# Altium PCB MiniRobot.PcbDoc
Units mm, origin at the board's own origin, x right, y up, seen from the top; angles counter-clockwise.
Board outline 90 x 85 mm, 2 copper layers (Top Layer, Bottom Layer); 52 components, 47 nets, 193 pads, 15 vias.
Unrouted connection lines stored in the file: 36.
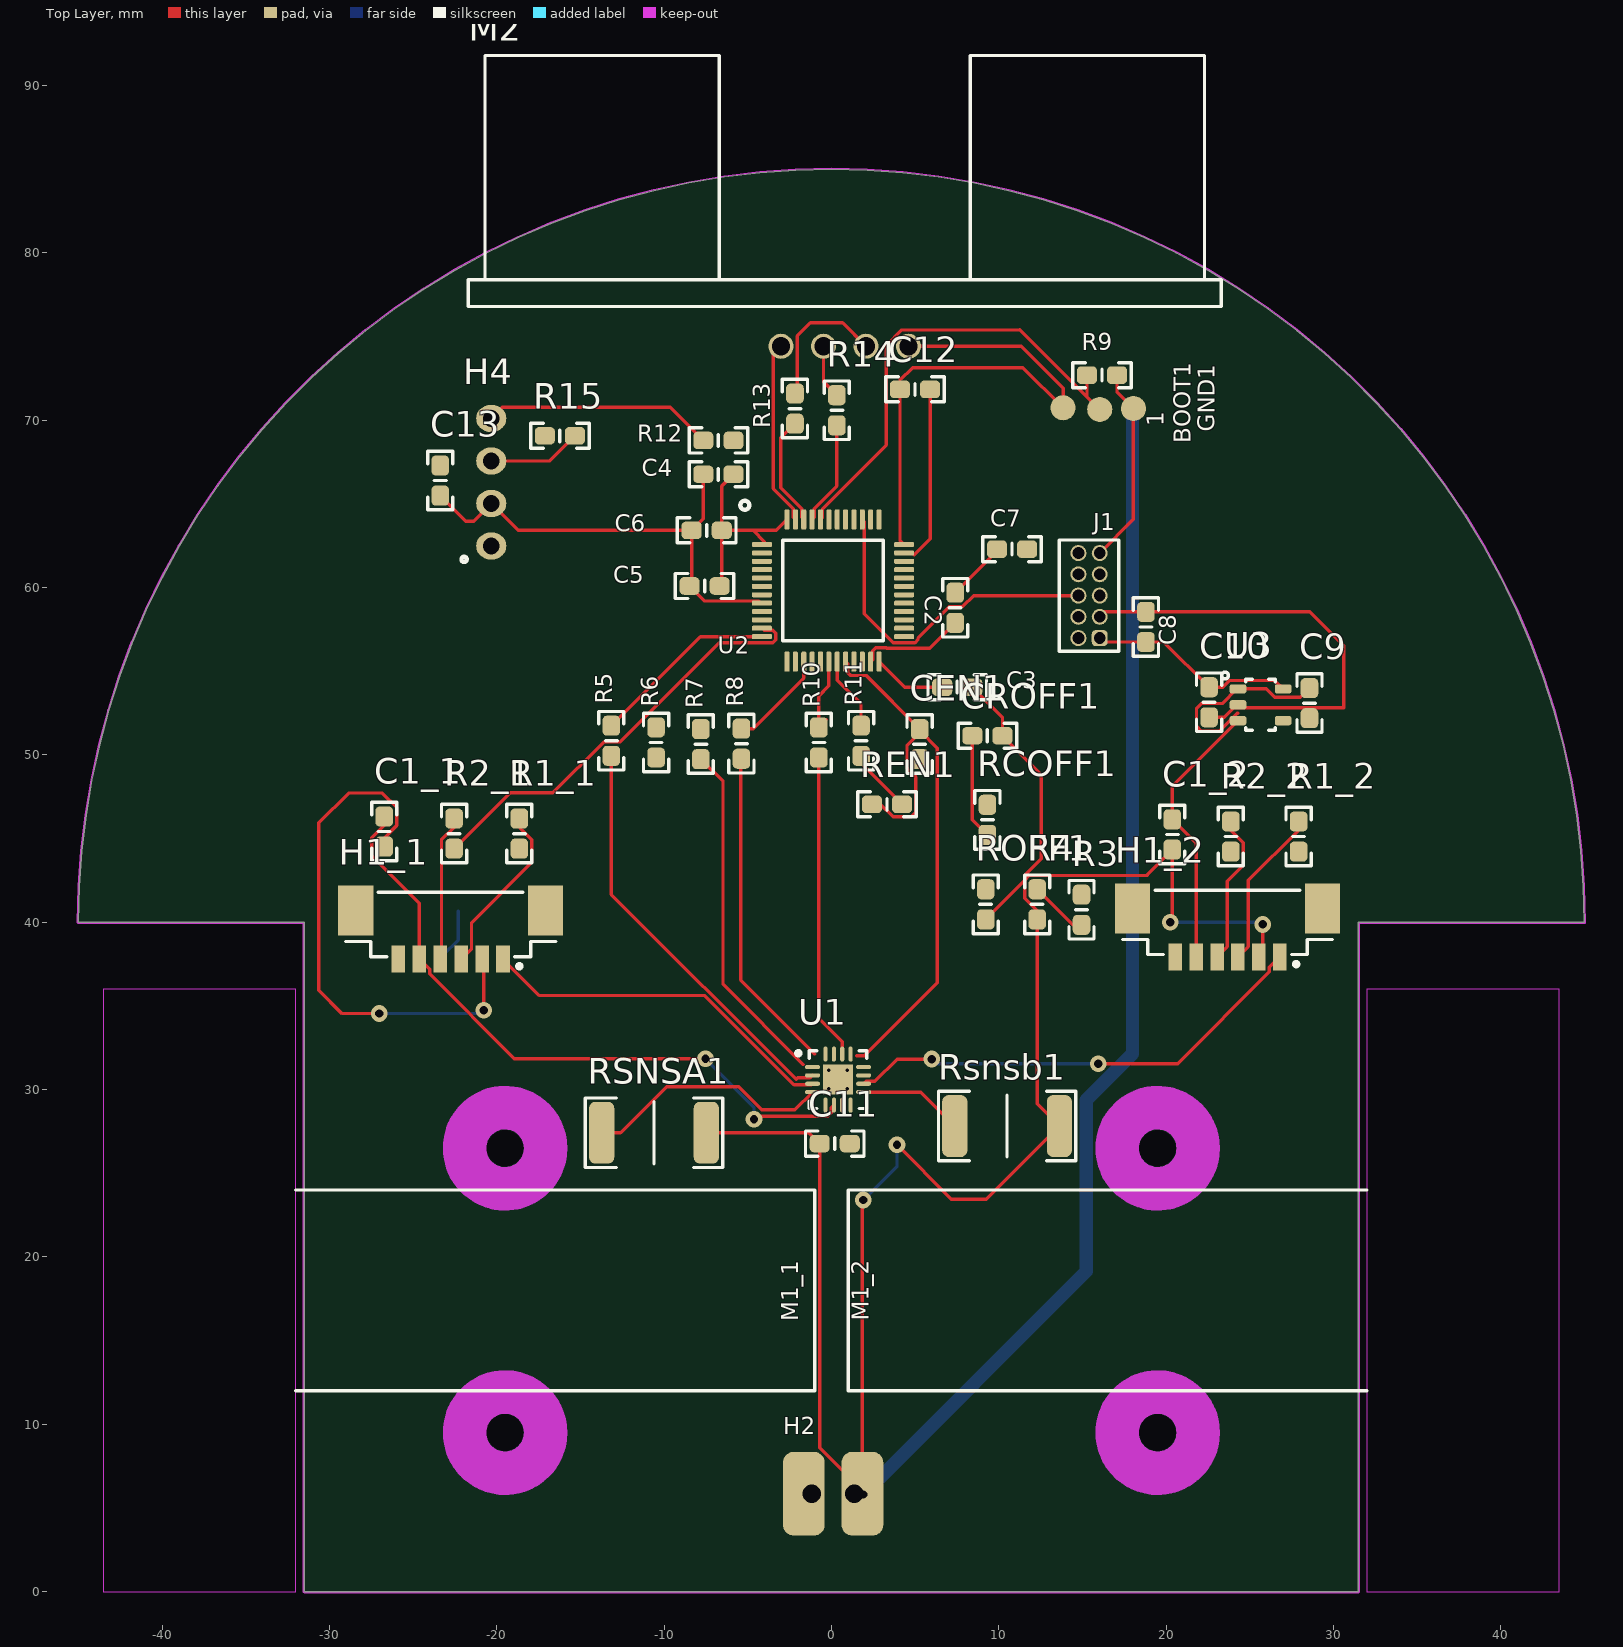
[diagram p0: Top Layer view]
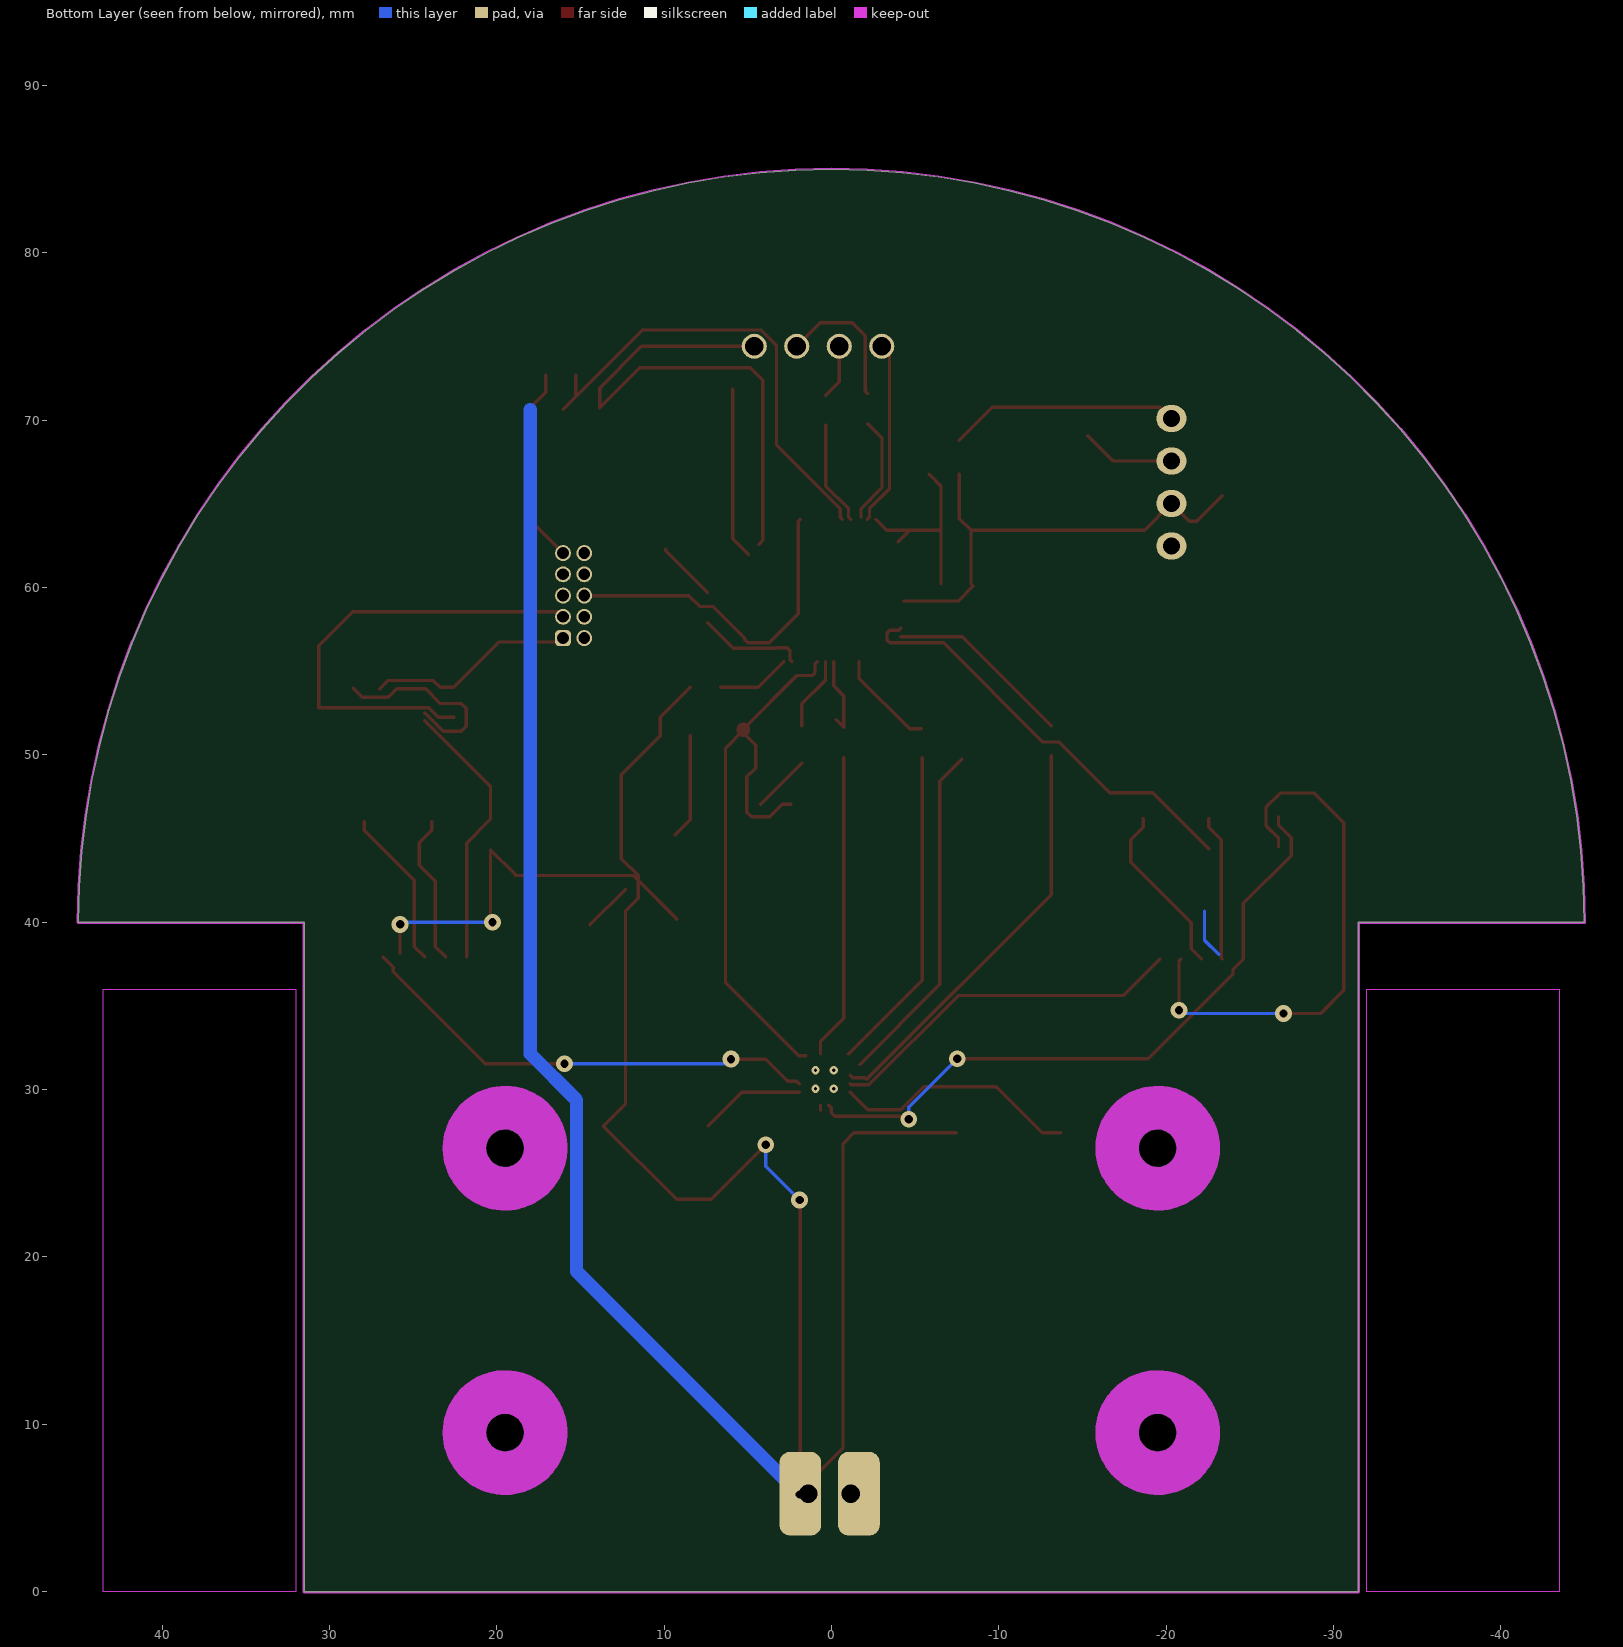
[diagram p1: Bottom Layer view, seen from below]

## Layer stack, top to bottom
Top Solder: solder mask 0.0102, Solder Resist, Dk 3.5
Top Layer: signal copper 0.0356
Dielectric 1: dielectric 0.32, FR-4, Dk 4.8
Bottom Layer: signal copper 0.0356
Bottom Solder: solder mask 0.0102, Solder Resist, Dk 3.5

## Board outline
45,40 44.949,42.141 44.796,44.278 44.542,46.404 44.187,48.516 43.732,50.609 43.177,52.678 42.525,54.718 41.777,56.725 40.933,58.694 39.998,60.62 38.971,62.5 37.856,64.329 36.656,66.103 35.372,67.817 34.009,69.469 32.568,71.054 31.054,72.568 29.469,74.009 27.817,75.372 26.103,76.656 24.329,77.856 22.5,78.971 20.62,79.998 18.694,80.933 16.725,81.777 14.718,82.525 12.678,83.177 10.609,83.732 8.516,84.187 6.404,84.542 4.278,84.796 2.141,84.949 0,85 -2.141,84.949 -4.278,84.796 -6.404,84.542 -8.516,84.187 -10.609,83.732 -12.678,83.177 -14.718,82.525 -16.725,81.777 -18.694,80.933 -20.62,79.998 -22.5,78.971 -24.329,77.856 -26.103,76.656 -27.817,75.372 -29.469,74.009 -31.054,72.568 -32.568,71.054 -34.009,69.469 -35.372,67.817 -36.656,66.103 -37.856,64.329 -38.971,62.5 -39.998,60.62 -40.933,58.694 -41.777,56.725 -42.525,54.718 -43.177,52.678 -43.732,50.609 -44.187,48.516 -44.542,46.404 -44.796,44.278 -44.949,42.141 -45,40 -31.5,40 -31.5,0 31.5,0 31.5,40

## Design rules (kind name [scope] priority, off if disabled: settings)
Clearance [All] p1: gap=0.125
ComponentClearance [All] p1 off: gap=0.254 collisioncheckmode=3 verticalgap=0.254 showdistances=FALSE
HoleSize [All] p1: absolutevalues=TRUE maxlimit=10 minlimit=0.19 maxpercent=80.000 minpercent=20.000
MinimumAnnularRing [All] p1: minimumring=0.076
MinimumSolderMaskSliver [All] p1: minsoldermaskwidth=0.154
PolygonConnect [All] p1: connectstyle=Relief reliefconductorwidth=0.254 reliefentries=4 polygonreliefangle="45 Angle" airgapwidth=0.254
RoomDefinition U_MR_UartConnector [InComponentClass('U_MR_UartConnector')] p1: confinementstyle=ConfineIn formatcopy=TRUE lockcomponents=FALSE outline -299.925,-25.175 -249.125,-25.175 -249.125,0.225 -299.925,0.225
RoomDefinition U_MR_RangeSensor [InComponentClass('U_MR_RangeSensor')] p2: confinementstyle=ConfineIn formatcopy=TRUE lockcomponents=FALSE outline -299.925,-25.175 -249.125,-25.175 -249.125,0.225 -299.925,0.225
RoomDefinition U_MR_Power [InComponentClass('U_MR_Power')] p3: confinementstyle=ConfineIn formatcopy=TRUE lockcomponents=FALSE outline -299.925,-25.175 -249.125,-25.175 -249.125,0.225 -299.925,0.225
RoomDefinition U_MR_Motor_Control [InComponentClass('U_MR_Motor_Control')] p4: confinementstyle=ConfineIn formatcopy=TRUE lockcomponents=FALSE outline -299.925,-25.175 -249.125,-25.175 -249.125,0.225 -299.925,0.225
RoomDefinition U_MR_Mcu [InComponentClass('U_MR_Mcu')] p5: confinementstyle=ConfineIn formatcopy=TRUE lockcomponents=FALSE outline -299.925,-25.175 -249.125,-25.175 -249.125,0.225 -299.925,0.225
RoomDefinition RightMotor [InComponentClass('RightMotor')] p6: confinementstyle=ConfineIn formatcopy=TRUE lockcomponents=FALSE outline -299.925,-25.175 -249.125,-25.175 -249.125,0.225 -299.925,0.225
RoomDefinition LeftMotor [InComponentClass('LeftMotor')] p7: confinementstyle=ConfineIn formatcopy=TRUE lockcomponents=FALSE outline -299.925,-25.175 -249.125,-25.175 -249.125,0.225 -299.925,0.225
RoutingVias [All] p1: holewidth=0.25 width=0.6 viastyle="Through Hole" minholewidth=0.2 minwidth=0.45 maxholewidth=1 maxwidth=2
SilkToSilkClearance [All] p1: silktosilkclearance=0.154
SilkToSolderMaskClearance [IsPad] p1: minsilkscreentomaskgap=0 clearancetoexposedcopper=TRUE
SolderMaskExpansion SolderMask_Via [IsVia] p1: expansion=-100
SolderMaskExpansion [All] p2: expansion=0.102
Width [All] p1: maxlimit=10 minlimit=0.075 preferedwidth=0.2 minimp=50.000000 maximp=50.000000 favimp=50.000000
24 further rules are at their usual default settings.

## Classes and differential pairs
channel class MR_Motor: LeftMotor RightMotor
component class U_MR_Power: C9 C10 H2 U3
component class RightMotor: C1_2 M1_2 R1_2 R2_2
component class LeftMotor: C1_1 H1_1 M1_1 R1_1 R2_1
component class U_MR_Mcu: 1 BOOT1 C2 C3 C4 C5 C6 C7 C8 GND1 J1 R5 R6 R7 R8 R9 R10 R11 R12 R13 U2
component class U_MR_Motor_Control: C11 CEN1 CROFF1 R3 R4 RCOFF1 REN1 ROFF1 RSNSA1 Rsnsb1 U1
component class U_MR_RangeSensor: C12 M2 R14
component class U_MR_UartConnector: C13 H4 R15

## Components (designator, comment, footprint, x,y, rotation, side; value= is the part's Value field where it differs from the comment)
1 "TestPoint" ROUND_TEST_POINT 13.85,70.75 r180 top
BOOT1 "TestPoint" ROUND_TEST_POINT 16.038,70.65 r270 top
C1_1 "CerCap" 0603_CAP_LD -26.725,45.425 r90 top (schematic designator C1)
C1_2 "CerCap" 0603_CAP_LD 20.375,45.25 r90 top (schematic designator C1)
C2 "CerCap" 0603_CAP_LD 7.4,58.8 r90 top
C3 "CerCap" 0603_CAP_LD 7.525,54.05 r180 top
C4 "CerCap" 0603_CAP_LD -6.75,66.775 r0 top
C5 "CerCap" 0603_CAP_LD -7.575,60.1 r0 top
C6 "CerCap" 0603_CAP_LD -7.45,63.425 r0 top
C7 "CerCap" 0603_CAP_LD 10.8,62.3 r180 top
C8 "CerCap" 0603_CAP_LD 18.8,57.65 r270 top
C9 "CerCap" 0603_CAP_LD 28.575,53.1 r90 top
C10 "CerCap" 0603_CAP_LD 22.575,53.15 r90 top
C11 "CerCap" 0603_CAP_LD 0.2,26.775 r0 top
C12 "CerCap" 0603_CAP_LD 5,71.85 r180 top
C13 "CerCap" 0603_CAP_LD -23.375,66.4 r90 top
CEN1 "CerCap" 0603_CAP_LD 5.275,50.65 r90 top
CROFF1 "CerCap" 0603_CAP_LD 9.325,51.15 r180 top
GND1 "TestPoint" ROUND_TEST_POINT 18.05,70.7 r90 top
H1_1 "Header" HEADER_1X6_PICOBLADE_653106124022 -22.75,39.875 r180 top (schematic designator H1)
H1_2 "Header" HEADER_1X6_PICOBLADE_653106124022 23.675,40 r180 top (schematic designator H1)
H2 "CustomBatteryConnector" CUSTOMBATTERYCONNECTOR 0.105,5.85 r0 top
H4 "Header" "HE14 1x4 Straight" -20.325,66.3 r90 top
J1 "Debug" 62201021121 15.4,59.525 r90 top
M1_1 "MotorGroup" MOTORGROUP -1,18 r0 top locked (schematic designator M1)
M1_2 "MotorGroup" MOTORGROUP 1,18 r180 top locked (schematic designator M1)
M2 "Ultrasonic Range Sensor" HC-SR04 0.8,74.425 r0 top
R1_1 "Resistor" 0603_RES_LD -18.65,45.3 r90 top (schematic designator R1)
R1_2 "Resistor" 0603_RES_LD 27.925,45.125 r90 top (schematic designator R1)
R2_1 "Resistor" 0603_RES_LD -22.55,45.3 r90 top (schematic designator R2)
R2_2 "Resistor" 0603_RES_LD 23.875,45.125 r90 top (schematic designator R2)
R3 "Resistor" 0603_RES_LD 14.95,40.75 r90 top
R4 "Resistor" 0603_RES_LD 12.3,41.075 r90 top
R5 "Resistor" 0603_RES_LD -13.15,50.85 r90 top
R6 "Resistor" 0603_RES_LD -10.475,50.75 r90 top
R7 "Resistor" 0603_RES_LD -7.8,50.65 r90 top
R8 "Resistor" 0603_RES_LD -5.375,50.675 r90 top
R9 "Resistor" 0603_RES_LD 16.175,72.7 r180 top
R10 "Resistor" 0603_RES_LD -0.75,50.75 r90 top
R11 "Resistor" 0603_RES_LD 1.775,50.85 r90 top
R12 "Resistor" 0603_RES_LD -6.75,68.8 r0 top
R13 "Resistor" 0603_RES_LD -2.175,70.7 r270 top
R14 "Resistor" 0603_RES_LD 0.325,70.6 r90 top
R15 "Resistor" 0603_RES_LD -16.225,69.075 r0 top
RCOFF1 "Resistor" 0603_RES_LD 9.325,46.125 r90 top
REN1 "Resistor" 0603_RES_LD 3.325,47.05 r180 top
ROFF1 "Resistor" 0603_RES_LD 9.225,41.075 r90 top
RSNSA1 "Resistor" 2512_RES_LD -10.6,27.425 r180 top
Rsnsb1 "Resistor" 2512_RES_LD 10.5,27.825 r180 top
U1 "Dual Brush Motor Driver" QFN-STSPIN240 0.4,30.6 r0 top
U2 "Microcontroller" STM32_LQFP48 0.1,59.825 r0 top
U3 "Low noise, Low Iq LDO" LP5907 25.65,53 r0 top

## Footprints (in the part's own frame and the unit in brackets; to place one, negate y for a bottom-side part, rotate by r counter-clockwise, add the part's x,y. Pads: shape width x height; smd on the part's side, far side on the other; paste and mask are expansions set on the pad)
0603_CAP_LD [mm] "0603 Capacitor Low Density"
  rrect50% 1.2x1.05 smd: 1(-0.9,0) 2(0.9,0)
  silkscreen extent -1.75,-0.75 1.75,0.75
0603_RES_LD [mm] "0603 Resistor Low Density"
  rrect50% 1.2x1.05 smd: 1(-0.9,0) 2(0.9,0)
  silkscreen extent -1.75,-0.75 1.75,0.75
2512_RES_LD [mm] "2512 Low Density Resistor"
  rrect50% 1.5x3.7 smd: 1(-3.125,0) 2(3.125,0)
  silkscreen extent -4.1,-2.07 4.1,2.07
62201021121 [mm] "Pin Header, pitch 1.27 mm, THT, Vertical, dual row, 10p"
  rrect50% 0.95x0.95 hole 0.7: 1(-2.54,-0.635)
  round 0.95 hole 0.7: 2(-2.54,0.635) 3(-1.27,-0.635) 4(-1.27,0.635) 5(0,-0.635) 6(0,0.635) 7(1.27,-0.635) 8(1.27,0.635) 9(2.54,-0.635) 10(2.54,0.635)
  silkscreen extent -3.32,-1.78 3.32,1.78, body extent -3.17,-1.7 3.18,1.7, height 5.33
CUSTOMBATTERYCONNECTOR [mm] "CustomBatteryConnector"
  rrect50% 2.5x5 smd paste-100: +(-1.75,0) -(1.75,0)
  rrect50% 2.5x5 smd far side paste-100: +(-1.75,0) -(1.75,0)
  round 1.5 hole 1.1 unplated paste-100: +(-1.27,0) -(1.27,0)
HC-SR04 [mm] "HC-SR04"
  round 1.5 hole 1.1 unplated: 1(-3.81,0) 2(-1.27,0) 3(1.27,0) 4(3.81,0)
  silkscreen extent -22.5,2.38 22.5,17.38, body extent -22.72,-0.3 22.72,17.49, height 20
"HE14 1x4 Straight" [mm] "Connector HE14 Straight 1x4"
  oval 1.6x1.8 hole 1 mask+0.102: 1(-3.81,0) 2(-1.27,0) 3(1.27,0) 4(3.81,0)
  silkscreen extent -4.77,1.47 -4.45,1.78, body extent -5.08,-1.27 5.08,1.27, height 9.5
HEADER_1X6_PICOBLADE_653106124022 [mm] "1.25mm SMT Male Vertical Shrouded Header, 6p"
  rect 0.81x1.6 smd: 1(-3.125,2.07) 2(-1.875,2.07) 3(-0.625,2.07) 4(0.625,2.07) 5(1.875,2.07) 6(3.125,2.07)
  rect 2.1x3 smd: ""(-5.675,-0.83) ""(5.675,-0.83)
  silkscreen extent -6.27,-1.92 6.27,2.62
LP5907 [mm] "LP5907 SOT23"
  rrect50% 1x0.55 smd mask+0.102: 1(-1.35,0.95) 2(-1.35,0) 3(-1.35,-0.95) 4(1.35,-0.95) 5(1.35,0.95)
  silkscreen extent -2.33,-1.52 0.88,1.95
MOTORGROUP [mm]
  round 0 hole 2.2 unplated paste+0 mask+0: 21(-18.5,8.5) 22(-18.5,-8.5)
  Keep-Out Layer pour cut-out: -31,-18 -31,18 -42.5,18 -42.5,-18
  Keep-Out Layer circle w2.6: c-18.5,-8.5 r2.425
  Keep-Out Layer circle w2.6: c-18.5,8.5 r2.425
  silkscreen extent -31,-6 0,6
QFN-STSPIN240 [mm] "QFN, 16-Leads, Body 3,00x3,00mm, Pitch 0,50mm, Thermal Pad 1,80x1,80mm, IPC Low Density"
  oval 0.9x0.25 smd: 1(-1.525,0.75) 2(-1.525,0.25) 3(-1.525,-0.25) 4(-1.525,-0.75) 9(1.525,-0.75) 10(1.525,-0.25) 11(1.525,0.25) 12(1.525,0.75)
  oval 0.25x0.9 smd: 5(-0.75,-1.525) 6(-0.25,-1.525) 7(0.25,-1.525) 8(0.75,-1.525) 13(0.75,1.525) 14(0.25,1.525) 15(-0.25,1.525) 16(-0.75,1.525)
  rect 1.8x1.8 smd: 17(0,0)
  silkscreen extent -2.5,-1.73 1.73,1.73
ROUND_TEST_POINT [mm] "Small round test point"
  round 1.5 smd paste-100: 1(0,0)
STM32_LQFP48 [mm]
  rrect50% 1.2x0.3 smd: 1(-4.25,2.75) 2(-4.25,2.25) 3(-4.25,1.75) 4(-4.25,1.25) 5(-4.25,0.75) 6(-4.25,0.25) 7(-4.25,-0.25) 8(-4.25,-0.75) 9(-4.25,-1.25) 10(-4.25,-1.75) 11(-4.25,-2.25) 12(-4.25,-2.75) 25(4.25,-2.75) 26(4.25,-2.25) 27(4.25,-1.75) 28(4.25,-1.25) 29(4.25,-0.75) 30(4.25,-0.25) 31(4.25,0.25) 32(4.25,0.75) 33(4.25,1.25) 34(4.25,1.75) 35(4.25,2.25) 36(4.25,2.75)
  rrect50% 0.3x1.2 smd: 13(-2.75,-4.25) 14(-2.25,-4.25) 15(-1.75,-4.25) 16(-1.25,-4.25) 17(-0.75,-4.25) 18(-0.25,-4.25) 19(0.25,-4.25) 20(0.75,-4.25) 21(1.25,-4.25) 22(1.75,-4.25) 23(2.25,-4.25) 24(2.75,-4.25) 37(2.75,4.25) 38(2.25,4.25) 39(1.75,4.25) 40(1.25,4.25) 41(0.75,4.25) 42(0.25,4.25) 43(-0.25,4.25) 44(-0.75,4.25) 45(-1.25,4.25) 46(-1.75,4.25) 47(-2.25,4.25) 48(-2.75,4.25)
  silkscreen extent -5.54,-3 3,5.37

## Part data
C1_1 C1_2 C2 C3 C4 C5 C6 C7 C8 C9 C10 C11 C12 C13 CEN1 CROFF1: "Ceramic Capacitor"
H1_1 H1_2: library part Header_6x1, "Header 6x1 Pins"
H2: library part BatteryConnector, "Custom Battery Connector"
H4: library part Header_4x1, "Header 4x1 PIns"
J1: library part Cortex_10x2, "Cortex 10 pins Debug Connector"
M1_1 M1_2: library part Motor
M2: library part HC-SR04
U1: library part STSPIN240, "ST Dual Motor Driver"
U2: library part STM32F303CBT6, "STM32F303 Microcontroller"
U3: library part LP5907, "LP5907 Low Noise Low Iq LDO"

## Via types
v1: diameter 1, hole 0.5, Top Layer to Bottom Layer, 11 vias
v2: diameter 0.5, hole 0.2, Top Layer to Bottom Layer, 4 vias

## Nets (pads, with @x,y where several pads share a name; then routed paths per layer and width w, separated by ;. In a path a pad name is that pad's centre, name@x,y a point inside that pad or via, vN(x,y) a via of type N, cw(c..) or ccw(c..) an arc to the next point about the centre after c; other vN are vias at no path point)
3V3: 1.1 C2.2 C3.2 C4.2 C5.2 C6.2 C7.2 C8.2 C10.2 C12.2 J1.1 M2.4 R3.2 U2.1 U2.9 U2.24 U2.36 U2.48 U3.5 | length 65
  Top Layer w0.2: C5.2@-6.55,60.225 C6.2 ; C4.2 -6.55,66.075 C6.2 ; -4,62.75 -4.675,63.425 ; U2.48 -3.3,63.425 -4.675,63.425 ; U2.24 4.375,54.05 C3.2 ; U2.36 4.1,62.825 C12.2 4.1,72.4 4.85,73.15 11.45,73.15 1.1 13.85,71.925 11.35,74.425 M2.4 ; C2.2 9.9,62.2 C7.2 ; J1.1 16.27,56.75 C8.2 19.875,56.75 C10.2 23.387,54.05 23.787,54.45 26.5,54.45 U3.5 ; C6.2 -4.675,63.425
BOOT0: BOOT1.1 R9.2 U2.44 | length 28.4
  Top Layer w0.2: U2.44 -0.525,64.2 -0.525,64.724 3.275,68.524 3.275,74.469 4.206,75.4 11.238,75.4 11.263,75.425 15.275,71.413 ; R9.2 15.275,71.413 ; BOOT1.1 15.275,71.413
GND: C1_1.1 C1_2.1 C2.1 C3.1 C4.1 C5.1 C6.1 C7.1 C8.1 C9.1 C10.1 C11.1 C12.1 C13.1 CEN1.1 CROFF1.1 GND1.1 H1_1.2 H1_2.2 H2.- H4.2 J1.3 J1.5 J1.9 M2.1 R4.1 R9.1 ROFF1.1 RSNSA1.1 Rsnsb1.1 U1.7 U2.8 U2.23 U2.35 U2.47 U3.2 | length 316.3
  Top Layer w0.2: v1(-27.025,34.55) -29.25,34.55 -30.625,35.925 -30.625,45.95 -28.85,47.725 -26.836,47.725 -25.975,46.864 -25.975,46.35 -25.975,45.786 -26.725,45.036 C1_1.1 ; C13.1 -21.85,63.975 -21.38,63.975 H4.2 -18.72,63.425 C6.1 ; v1@-20.875,34.65 -20.776,34.749 v1(-20.776,34.752) -20.776,37.706 H1_1.2 ; C5.1 -7.575,59.2 U2.8@-4.325,59.2 ; C5.1@-8.35,60.225 C6.1 ; C4.1 -7.65,64.125 C6.1 ; RSNSA1.1 -1.35,27.425 C11.1 -0.7,8.607 H2.-@1.716,6.191 ; M2.1 -3.475,73.96 -3.475,65.924 -2.275,64.724 -2.275,64.2 U2.47 ; U1.7@0.65,28.75 U1.7 ; v1(1.9,5.805) 1.855,5.85 1.855,23.355 v1(1.9,23.4) ; U2.23 2.475,55.7 2.475,56.224 2.651,56.4 3.285,56.4 3.31,56.375 5.875,56.375 C2.1 ; v1(3.925,26.7) 7.175,23.45 9.25,23.45 Rsnsb1.1 12.3,29.15 R4.1 12.3,40.686 11.55,41.436 11.55,42.5 ; 4.95,61.975 5.9,62.925 C12.1 ; C3.1 10.225,52.25 CROFF1.1 12.55,48.825 12.55,43.8 11.55,42.8 11.55,42.514 ; ROFF1.1 11.55,42.5 ; J1.3 16.33,58.55 C8.1 28.6,58.55 30.625,56.525 30.625,52.825 24.062,52.825 23.487,52.25 C10.1 ; J1.9 18.05,64.08 GND1.1 17.075,71.675 R9.1 ; v1(20.25,40) 20.375,40.125 C1_2.1 18.898,42.873 18.898,42.8 11.836,42.8 11.55,42.514 ; H1_2.2@25.775,38.155 v1(25.775,39.875) ; 11.55,42.5 11.55,42.514
  Bottom Layer w0.2: v1(-27.025,34.55) -20.975,34.55 -20.776,34.749 v1(-20.776,34.752) ; v1(1.9,23.4) 3.925,25.425 v1(3.925,26.7) ; v1(20.25,40) 25.65,40 v1(25.775,39.875)
  Bottom Layer w0.8: v1(1.9,5.805) 15.229,19.134 15.229,29.38 18,32.15 18,70.65
NetCEN1_2: CEN1.2 REN1.2 U1.13 U2.20 | length 36.9
  Top Layer w0.2: U2.20 0.975,55.45 0.975,54.926 1.151,54.75 2.075,54.75 CEN1.2 ; 1.523,32.019 1.958,32.019 6.325,36.386 6.325,50.414 CEN1.2@5.275,51.464 ; REN1.2 2.936,47.05 3.686,46.3 4.764,46.3 5.05,46.586 5.05,48.686 4.525,49.211 4.525,50.575 CEN1.2@5.275,51.325
  Top Layer w0.8: CEN1.2@5.275,51.464 CEN1.2
NetCROFF1_2: CROFF1.2 RCOFF1.1 | length 6.3
  Top Layer w0.2: CROFF1.2 8.425,46.125 RCOFF1.1
NetH1_1_1: H1_1.1 U1.3 | length 21.6
  Top Layer w0.2: H1_1.1 -17.445,35.625 -7.576,35.625 -2.235,30.284 -1.191,30.284 U1.3
NetH1_1_3: H1_1.3 R1_1.2 | length 10.5
  Top Layer w0.2: H1_1.3 -21.505,38.425 -21.505,39.97 -17.9,43.575 -17.9,44.939 -18.65,45.689 R1_1.2
NetH1_1_4: H1_1.4 R2_1.2 | length 8.7
  Top Layer w0.2: H1_1.4 -23.3,37.88 -23.3,44.939 -22.55,45.689 R2_1.2
NetH1_1_6: H1_1.6 U1.5
NetH1_2_1: H1_2.1 U1.10 | length 28.4
  Top Layer w0.2: U1.10 2.075,30.5 2.6,30.5 3.925,31.825 v1(6,31.825) ; v1(15.95,31.55) 20.693,31.55 26.18,37.037 26.18,37.31 H1_2.1
  Bottom Layer w0.2: v1(6,31.825) 6.275,31.55 v1(15.95,31.55)
NetH1_2_3: H1_2.3 R1_2.2 | length 9.6
  Top Layer w0.2: H1_2.3 24.92,38.55 24.92,42.509 27.925,45.514 R1_2.2
NetH1_2_4: H1_2.4 R2_2.2 | length 9.1
  Top Layer w0.2: H1_2.4 23.67,38.55 23.67,42.445 24.625,43.4 24.625,44.764 23.875,45.514 R2_2.2
NetH1_2_6: H1_2.6 U1.8
NetH4_3: H4.3 R15.2 | length 5.6
  Top Layer w0.2: H4.3 -16.83,67.57 R15.2
NetH4_4: H4.4 R12.1 | length 13.8
  Top Layer w0.2: H4.4 -19.66,70.775 -9.625,70.775 R12.1
NetM2_2: M2.2 R14.2 | length 3.3
  Top Layer w0.2: M2.2 -0.47,72.295 R14.2
NetM2_3: M2.3 R13.1 | length 8.5
  Top Layer w0.2: R13.1 -2.035,71.74 -2.035,75.04 -1.25,75.825 0.67,75.825 M2.3
NetR1_1_1: R1_1.1 U2.10
NetR1_2_1: R1_2.1 U2.16
NetR2_1_1: R2_1.1 U2.11 | length 25.7
  Top Layer w0.2: R2_1.1 -19.2,47.75 -16.639,47.75 -13.614,50.775 -12.639,50.775 -6.714,56.7 -3.501,56.7 -3.325,56.876 -3.325,57.274 -3.501,57.45 -4.025,57.45 U2.11
NetR2_2_1: R2_2.1 U2.17
NetR3_1: R3.1 R4.2 U1.11 | length 3
  Top Layer w0.2: R4.2 R3.1@14.425,39.85
NetR5_1: R5.1 U1.2 | length 25
  Top Layer w0.2: R5.1 -13.15,41.659 -2.1,30.609 -2.009,30.7 -1.275,30.7 U1.2
NetR5_2: R5.2 U2.12 | length 11.2
  Top Layer w0.2: R5.2 -7.825,57.075 U2.12
NetR6_1: R6.1 U1.16
NetR6_2: R6.2 U2.13
NetR7_1: R7.1 U1.1 | length 20.8
  Top Layer w0.2: R7.1 -6.475,48.425 -6.475,36.292 -1.683,31.5
NetR7_2: R7.2 U2.14
NetR8_1: R8.1 U1.15 | length 19.6
  Top Layer w0.2: R8.1@-5.425,49.85 -5.425,36.55 -1,32.125
NetR8_2: R8.2 U2.15 | length 6
  Top Layer w0.2: R8.2 -4.675,51.575 -1.65,54.6 U2.15
NetR10_1: R10.1 U1.14 | length 18.3
  Top Layer w0.2: R10.1 -0.75,34.269 0.65,32.869 U1.14
NetR10_2: R10.2 U2.18 | length 4.8
  Top Layer w0.2: R10.2@-0.296,52.104 R10.2 -0.75,53.525 -0.15,54.125 U2.18
NetR11_1: R11.1 REN1.1 | length 3.5
  Top Layer w0.2: R11.1@1.775,49.5 REN1.1
NetR11_2: R11.2 U2.19 | length 4.4
  Top Layer w0.2: U2.19 0.35,54.475 1.775,53.05 R11.2
NetR12_2: R12.2 U2.42
NetR13_2: R13.2 U2.46 | length 6.5
  Top Layer w0.2: R13.2 -3.025,68.95 -3.025,65.974 -1.775,64.724 U2.46@-1.775,64.2
NetR14_1: R14.1 U2.45 | length 6.2
  Top Layer w0.2: U2.45 -1.025,64.2 -1.025,64.724 0.325,66.074 R14.1
NetR15_1: R15.1 U2.43
NetRCOFF1_2: RCOFF1.2 ROFF1.2 U1.12
NetRSNSA1_2: RSNSA1.2 U1.4 | length 14.7
  Top Layer w0.2: RSNSA1.2 -12.6,27.425 -9.85,30.175 -5.525,30.175 -4.15,28.8 -2.175,28.8 U1.4
NetRsnsb1_2: Rsnsb1.2 U1.9 | length 6.3
  Top Layer w0.2: U1.9 5.35,29.85 Rsnsb1.2
nRST: J1.10 U2.7
SWCLK: J1.4 U2.37
SWDIO: J1.2 U2.34
SWO: J1.6 U2.39 | length 20.4
  Top Layer w0.2: U2.39 1.975,63.95 1.975,58.426 3.701,56.7 4.999,56.7 5.175,56.876 5.175,56.964 7.086,58.875 7.864,58.875 8.514,59.525 J1.6
VBAT: C13.2 H4.1
VBATT: C1_1.2 C1_2.2 C9.2 C11.2 H1_1.5 H1_2.5 H2.+ U1.6 U3.1 U3.3 | length 68.1
  Top Layer w0.2: C1_1.2 -26.725,45.814 -27.475,45.064 -27.475,43.986 -24.625,41.136 H1_1.5 -24.005,37.185 -24.005,36.912 -18.943,31.85 v1(-7.525,31.85) ; v1@-4.476,28.226 v1(-4.625,28.226) -4.452,28.4 -0.205,28.4 0,28.605 0,28.925 U1.6 ; H1_2.5 21.8,44.725 C1_2.2 20.375,48.125 U3.3 ; 24.3,52.5 24.26,52.5 23.185,51.425 22.111,51.425 21.825,51.711 21.825,52.789 22.111,53.075 23.362,53.075 24.237,53.95 U3.1 25.987,53.95 26.487,53.45 28.025,53.45 C9.2
  Bottom Layer w0.2: v1(-7.525,31.85) -4.625,28.95 v1(-4.625,28.226)
pads on no net: H1_1. H1_2. J1.7 J1.8 M1_1.21 M1_1.22 M1_2.21 M1_2.22 U1.17 U2.2 U2.3 U2.4 U2.5 U2.6 U2.21 U2.22 U2.25 U2.26 U2.27 U2.28 U2.29 U2.30 U2.31 U2.32 U2.33 U2.38 U2.40 U2.41 U3.4
copper on no net: | length 4.5
  Bottom Layer w0.2: -23.16,38.081 -22.3,38.941 ; -22.3,40.525 -22.3,38.941 ; -22.3,40.675 -22.3,38.941
  other v2: -0.15,30.05 0.95,30.05 -0.15,31.15 0.95,31.15

## Keep-outs
Keep-Out Layer:
  lines w0.1: 44.999,42.141 ccw(c44.949,42.141) 44.999,42.142 ; -45.05,40.001 ccw(c-45,40) -45,39.95 ; -45.05,40.002 ccw(c-45,40) -45,39.95 ; -45.05,40.002 -44.999,42.142 ; -45.05,40.001 -45.05,40.002 ; -45,39.95 -31.55,39.95 -31.55,0 ; -44.999,42.142 cw(c-44.949,42.141) -44.999,42.145 ; -44.999,42.142 cw(c-44.949,42.141) -44.999,42.145 ; -44.999,42.142 -44.999,42.142 ; -44.999,42.145 -44.846,44.281 ; -44.846,44.281 cw(c-44.796,44.278) -44.846,44.283 ; -44.846,44.281 cw(c-44.796,44.278) -44.846,44.283 ; -44.846,44.283 -44.592,46.41 ; -44.592,46.41 cw(c-44.542,46.404) -44.591,46.413 ; -44.592,46.41 cw(c-44.542,46.404) -44.591,46.412 ; -44.591,46.413 -44.236,48.524 ; -44.591,46.412 -44.591,46.413 ; -44.236,48.525 cw(c-44.187,48.516) -44.236,48.527 ; -44.236,48.524 cw(c-44.187,48.516) -44.236,48.527 ; -44.236,48.524 -44.236,48.525 ; -44.236,48.527 ccw(c-44.187,48.516) -44.236,48.527 ; -44.236,48.527 -43.78,50.62 ; -44.236,48.527 -44.236,48.527 ; -44.236,48.527 -44.236,48.527 ; -43.78,50.62 cw(c-43.732,50.609) -43.78,50.622 ; -43.78,50.62 ccw(c-43.732,50.609) -43.78,50.62 ; -43.78,50.62 cw(c-43.732,50.609) -43.78,50.622 ; -43.78,50.62 -43.78,50.62 ; -43.78,50.62 -43.78,50.62 ; -43.78,50.622 ccw(c-43.732,50.609) -43.78,50.622 ; -43.78,50.622 -43.226,52.691 ; -43.78,50.622 -43.78,50.622 ; -43.78,50.622 -43.78,50.622 ; -43.226,52.691 cw(c-43.177,52.678) -43.225,52.693 ; -43.226,52.691 ccw(c-43.177,52.678) -43.226,52.691 ; -43.226,52.691 cw(c-43.177,52.678) -43.225,52.693 ; -43.226,52.691 -43.226,52.691 ; -43.226,52.691 -43.226,52.691 ; -43.225,52.693 -42.573,54.733 ; -42.573,54.733 cw(c-42.525,54.718) -42.572,54.735 ; -42.573,54.733 cw(c-42.525,54.718) -42.572,54.736 ; -42.572,54.736 ccw(c-42.525,54.718) -42.572,54.735 ; -42.572,54.736 -41.824,56.742 ; -42.572,54.736 -42.572,54.736 ; -42.572,54.735 -42.572,54.736 ; -41.823,56.742 cw(c-41.777,56.725) -41.823,56.744 ; -41.823,56.742 ccw(c-41.777,56.725) -41.823,56.742 ; -41.823,56.742 cw(c-41.777,56.725) -41.823,56.744 ; -41.823,56.742 -41.823,56.742 ; -41.824,56.742 -41.823,56.742 ; -41.823,56.744 -40.979,58.713 ; -40.979,58.713 cw(c-40.933,58.694) -40.979,58.715 ; -40.979,58.713 cw(c-40.933,58.694) -40.978,58.716 ; -40.979,58.715 cw(c-40.933,58.694) -40.978,58.716 ; -40.979,58.715 -40.978,58.716 ; -40.978,58.716 -40.043,60.642 ; -40.978,58.716 -40.978,58.716 ; -40.043,60.642 cw(c-39.998,60.62) -40.042,60.644 ; -40.043,60.642 cw(c-39.998,60.62) -40.043,60.642 ; -40.043,60.642 -40.043,60.642 ; -40.043,60.642 -40.043,60.642 ; -40.043,60.642 cw(c-39.998,60.62) -40.042,60.644 ; -40.042,60.644 -39.015,62.524 ; -39.015,62.524 cw(c-38.971,62.5) -39.014,62.526 ; -39.015,62.524 cw(c-38.971,62.5) -39.014,62.526 ; -39.014,62.526 -37.899,64.355 ; -37.899,64.355 cw(c-37.856,64.329) -37.898,64.357 ; -37.899,64.355 cw(c-37.856,64.329) -37.898,64.357 ; -37.898,64.357 -36.698,66.13 ; -37.898,64.357 -37.898,64.357 ; -36.697,66.131 cw(c-36.656,66.103) -36.696,66.133 ; -36.698,66.13 cw(c-36.656,66.103) -36.696,66.133 ; -36.698,66.13 -36.697,66.131 ; -36.696,66.133 -35.412,67.847 ; -35.412,67.847 cw(c-35.372,67.817) -35.411,67.849 ; -35.412,67.847 cw(c-35.372,67.817) -35.411,67.849 ; -35.411,67.849 -34.047,69.501 ; -34.047,69.501 cw(c-34.009,69.469) -34.046,69.502 ; -34.047,69.501 cw(c-34.009,69.469) -34.046,69.502 ; -34.046,69.503 ccw(c-34.009,69.469) -34.046,69.502 ; -34.046,69.503 -32.605,71.087 ; -34.046,69.502 -34.046,69.503 ; -34.046,69.502 -34.046,69.502 ; -32.605,71.087 cw(c-32.568,71.054) -32.603,71.089 ; -32.605,71.087 ccw(c-32.568,71.054) -32.605,71.087 ; -32.605,71.087 cw(c-32.568,71.054) -32.603,71.089 ; -32.605,71.087 -32.605,71.087 ; -32.605,71.087 -32.605,71.087 ; -32.603,71.089 -31.089,72.603 ; -31.55,0 ccw(c-31.5,0) -31.5,-0.05 ; -31.55,0 ccw(c-31.5,0) -31.5,-0.05 ; -31.5,-0.05 31.5,-0.05 ; -31.089,72.603 cw(c-31.054,72.568) -31.087,72.605 ; -31.089,72.603 cw(c-31.054,72.568) -31.087,72.605 ; -31.087,72.605 ccw(c-31.054,72.568) -31.087,72.605 ; -31.087,72.605 -29.503,74.046 ; -31.087,72.605 -31.087,72.605 ; -31.087,72.605 -31.087,72.605 ; -29.503,74.046 cw(c-29.469,74.009) -29.502,74.046 ; -29.503,74.046 -29.502,74.046 ; -29.502,74.046 cw(c-29.469,74.009) -29.501,74.047 ; -29.502,74.046 cw(c-29.469,74.009) -29.501,74.047 ; -29.502,74.046 -29.502,74.046 ; -29.501,74.047 -27.849,75.411 ; -27.849,75.411 cw(c-27.817,75.372) -27.847,75.412 ; -27.849,75.411 cw(c-27.817,75.372) -27.847,75.412 ; -27.847,75.412 -26.133,76.696 ; -26.133,76.696 cw(c-26.103,76.656) -26.13,76.698 ; -26.133,76.696 cw(c-26.103,76.656) -26.131,76.697 -26.13,76.698 ; -26.13,76.698 -24.357,77.898 ; -24.357,77.898 cw(c-24.329,77.856) -24.355,77.899 ; -24.357,77.898 cw(c-24.329,77.856) -24.355,77.899 ; -24.357,77.898 -24.357,77.898 ; -24.355,77.899 -22.526,79.014 ; -22.526,79.014 cw(c-22.5,78.971) -22.524,79.015 ; -22.526,79.014 cw(c-22.5,78.971) -22.524,79.015 ; -22.524,79.015 -20.644,80.041 ; -20.644,80.041 cw(c-20.62,79.998) -20.642,80.042 ; -20.644,80.041 cw(c-20.62,79.998) -20.642,80.043 ; -20.642,80.042 cw(c-20.62,79.998) -20.642,80.043 ; -20.642,80.043 -20.642,80.043 ; -20.642,80.042 -20.642,80.043 ; -20.642,80.043 -18.716,80.978 ; -18.716,80.978 cw(c-18.694,80.933) -18.713,80.979 ; -18.715,80.979 ccw(c-18.694,80.933) -18.716,80.978 ; -18.715,80.979 cw(c-18.694,80.933) -18.713,80.979 ; -18.716,80.978 -18.715,80.979 ; -18.716,80.978 -18.716,80.978 ; -18.713,80.979 -16.745,81.823 ; -16.745,81.823 cw(c-16.725,81.777) -16.742,81.823 ; -16.745,81.823 cw(c-16.725,81.777) -16.742,81.823 ; -16.742,81.823 cw(c-16.725,81.777) -16.742,81.823 ; -16.742,81.823 -16.742,81.823 ; -16.742,81.823 -16.742,81.823 ; -16.742,81.823 -14.736,82.572 ; -14.736,82.572 cw(c-14.718,82.525) -14.735,82.572 ; -14.736,82.572 -14.736,82.572 ; -14.736,82.572 cw(c-14.718,82.525) -14.733,82.573 ; -14.735,82.572 cw(c-14.718,82.525) -14.733,82.573 ; -14.736,82.572 -14.735,82.572 ; -14.733,82.573 -12.693,83.225 ; -12.693,83.225 cw(c-12.678,83.177) -12.691,83.225 ; -12.693,83.225 cw(c-12.678,83.177) -12.691,83.226 ; -12.691,83.225 cw(c-12.678,83.177) -12.691,83.226 ; -12.691,83.225 -12.691,83.226 ; -12.691,83.226 -10.622,83.78 ; -12.691,83.226 -12.691,83.226 ; -10.622,83.78 cw(c-10.609,83.732) -10.622,83.78 ; -10.622,83.78 -10.622,83.78 ; -10.622,83.78 cw(c-10.609,83.732) -10.62,83.78 ; -10.622,83.78 cw(c-10.609,83.732) -10.62,83.78 ; -10.622,83.78 -10.622,83.78 ; -10.62,83.78 -8.527,84.236 ; -8.527,84.236 cw(c-8.516,84.187) -8.524,84.236 ; -8.527,84.236 cw(c-8.516,84.187) -8.525,84.236 -8.524,84.236 ; -8.524,84.236 -6.413,84.591 ; -6.412,84.591 cw(c-6.404,84.542) -6.41,84.592 ; -6.413,84.591 cw(c-6.404,84.542) -6.41,84.592 ; -6.413,84.591 -6.412,84.591 ; -6.41,84.592 -4.283,84.846 ; -4.283,84.846 cw(c-4.278,84.796) -4.281,84.846 ; -4.283,84.846 cw(c-4.278,84.796) -4.281,84.846 ; -4.281,84.846 -2.145,84.999 ; -2.145,84.999 cw(c-2.141,84.949) -2.142,84.999 ; -2.145,84.999 cw(c-2.141,84.949) -2.142,84.999 -2.142,84.999 ; -2.142,84.999 -0.002,85.05 ; -0.001,85.05 cw(c0,85) 0.002,85.05 ; -0.002,85.05 cw(c0,85) 0.001,85.05 0.002,85.05 ; -0.002,85.05 -0.001,85.05 ; 0.002,85.05 2.142,84.999 ; 2.142,84.999 cw(c2.141,84.949) 2.145,84.999 ; 2.142,84.999 cw(c2.141,84.949) 2.145,84.999 ; 2.142,84.999 2.142,84.999 ; 2.145,84.999 4.281,84.846 ; 4.281,84.846 cw(c4.278,84.796) 4.283,84.846 ; 4.281,84.846 cw(c4.278,84.796) 4.283,84.846 ; 4.283,84.846 6.41,84.592 ; 6.41,84.592 cw(c6.404,84.542) 6.413,84.591 ; 6.41,84.592 cw(c6.404,84.542) 6.412,84.591 ; 6.413,84.591 8.524,84.236 ; 6.412,84.591 6.413,84.591 ; 8.524,84.236 cw(c8.516,84.187) 8.527,84.236 ; 8.524,84.236 8.525,84.236 cw(c8.516,84.187) 8.527,84.236 ; 8.527,84.236 cw(c8.516,84.187) 8.527,84.236 ; 8.527,84.236 8.527,84.236 ; 8.527,84.236 10.62,83.78 ; 8.527,84.236 8.527,84.236 ; 10.62,83.78 cw(c10.609,83.732) 10.622,83.78 ; 10.62,83.78 ccw(c10.609,83.732) 10.62,83.78 ; 10.62,83.78 cw(c10.609,83.732) 10.622,83.78 ; 10.62,83.78 10.62,83.78 ; 10.62,83.78 10.62,83.78 ; 10.622,83.78 ccw(c10.609,83.732) 10.622,83.78 ; 10.622,83.78 12.691,83.226 ; 10.622,83.78 10.622,83.78 ; 10.622,83.78 10.622,83.78 ; 12.691,83.226 cw(c12.678,83.177) 12.693,83.225 ; 12.691,83.225 ccw(c12.678,83.177) 12.691,83.226 ; 12.691,83.225 cw(c12.678,83.177) 12.693,83.225 ; 12.691,83.226 12.691,83.225 ; 12.691,83.226 12.691,83.226 ; 12.693,83.225 14.733,82.573 ; 14.733,82.573 cw(c14.718,82.525) 14.735,82.572 ; 14.733,82.573 cw(c14.718,82.525) 14.736,82.572 ; 14.736,82.572 ccw(c14.718,82.525) 14.735,82.572 ; 14.736,82.572 16.742,81.823 ; 14.736,82.572 14.736,82.572 ; 14.735,82.572 14.736,82.572 ; 16.742,81.823 cw(c16.725,81.777) 16.744,81.823 ; 16.742,81.823 ccw(c16.725,81.777) 16.742,81.823 ; 16.742,81.823 cw(c16.725,81.777) 16.744,81.823 ; 16.742,81.823 16.742,81.823 ; 16.742,81.823 16.742,81.823 ; 16.744,81.823 18.713,80.979 ; 18.713,80.979 cw(c18.694,80.933) 18.715,80.979 ; 18.713,80.979 cw(c18.694,80.933) 18.716,80.978 ; 18.716,80.978 ccw(c18.694,80.933) 18.715,80.979 ; 18.716,80.978 20.642,80.043 ; 18.716,80.978 18.716,80.978 ; 18.715,80.979 18.716,80.978 ; 20.642,80.042 ccw(c20.62,79.998) 20.642,80.043 ; 20.642,80.042 cw(c20.62,79.998) 20.644,80.042 ; 20.642,80.042 20.642,80.043 ; 20.642,80.043 cw(c20.62,79.998) 20.644,80.042 ; 20.642,80.043 20.642,80.043 ; 20.644,80.042 22.524,79.015 ; 22.524,79.015 cw(c22.5,78.971) 22.526,79.014 ; 22.524,79.015 cw(c22.5,78.971) 22.526,79.014 ; 22.526,79.014 24.355,77.899 ; 24.355,77.899 cw(c24.329,77.856) 24.357,77.898 ; 24.355,77.899 cw(c24.329,77.856) 24.357,77.898 ; 24.357,77.898 26.13,76.698 ; 24.357,77.898 24.357,77.898 ; 26.13,76.698 cw(c26.103,76.656) 26.133,76.696 ; 26.13,76.698 26.131,76.697 cw(c26.103,76.656) 26.133,76.696 ; 26.133,76.696 27.847,75.412 ; 27.847,75.412 cw(c27.817,75.372) 27.849,75.411 ; 27.847,75.412 cw(c27.817,75.372) 27.849,75.411 ; 27.849,75.411 29.501,74.047 ; 29.501,74.047 cw(c29.469,74.009) 29.502,74.046 ; 29.501,74.047 cw(c29.469,74.009) 29.502,74.046 ; 29.502,74.046 cw(c29.469,74.009) 29.503,74.046 ; 29.502,74.046 29.502,74.046 ; 29.503,74.046 31.087,72.605 ; 29.503,74.046 29.502,74.046 ; 31.087,72.605 cw(c31.054,72.568) 31.087,72.605 ; 31.087,72.605 31.087,72.605 ; 31.087,72.605 cw(c31.054,72.568) 31.089,72.603 ; 31.087,72.605 cw(c31.054,72.568) 31.089,72.603 ; 31.087,72.605 31.087,72.605 ; 31.089,72.603 32.603,71.089 ; 31.5,-0.05 ccw(c31.5,0) 31.55,0 ; 31.5,-0.05 ccw(c31.5,0) 31.55,0 ; 31.55,0 31.55,39.95 45,39.95 ; 32.603,71.089 cw(c32.568,71.054) 32.605,71.087 ; 32.603,71.089 cw(c32.568,71.054) 32.605,71.087 ; 32.605,71.087 ccw(c32.568,71.054) 32.605,71.087 ; 32.605,71.087 32.605,71.087 ; 32.605,71.087 32.605,71.087 ; 32.605,71.087 34.046,69.503 ; 34.046,69.502 cw(c34.009,69.469) 34.047,69.501 ; 34.046,69.502 ccw(c34.009,69.469) 34.046,69.503 ; 34.046,69.502 cw(c34.009,69.469) 34.047,69.501 ; 34.046,69.503 34.046,69.502 ; 34.046,69.502 34.046,69.502 ; 34.047,69.501 35.411,67.849 ; 35.411,67.849 cw(c35.372,67.817) 35.412,67.847 ; 35.411,67.849 cw(c35.372,67.817) 35.412,67.847 ; 35.412,67.847 36.696,66.133 ; 36.696,66.133 cw(c36.656,66.103) 36.698,66.13 ; 36.696,66.133 cw(c36.656,66.103) 36.697,66.131 ; 36.697,66.131 36.698,66.13 ; 36.698,66.13 37.898,64.357 ; 37.898,64.357 cw(c37.856,64.329) 37.899,64.355 ; 37.898,64.357 cw(c37.856,64.329) 37.899,64.355 ; 37.898,64.357 37.898,64.357 ; 37.899,64.355 39.014,62.526 ; 39.014,62.526 cw(c38.971,62.5) 39.015,62.524 ; 39.014,62.526 cw(c38.971,62.5) 39.015,62.524 ; 39.015,62.524 40.041,60.644 ; 40.041,60.644 cw(c39.998,60.62) 40.042,60.642 ; 40.041,60.644 cw(c39.998,60.62) 40.043,60.642 ; 40.043,60.642 ccw(c39.998,60.62) 40.042,60.642 ; 40.043,60.642 40.042,60.642 ; 40.043,60.642 40.043,60.642 ; 40.043,60.642 40.978,58.716 ; 40.979,58.715 ccw(c40.933,58.694) 40.978,58.716 ; 40.979,58.715 cw(c40.933,58.694) 40.979,58.713 ; 40.979,58.715 40.978,58.716 ; 40.978,58.716 cw(c40.933,58.694) 40.979,58.713 ; 40.978,58.716 40.978,58.716 ; 40.979,58.713 41.823,56.745 ; 41.823,56.742 ccw(c41.777,56.725) 41.823,56.745 ; 41.823,56.742 ccw(c41.777,56.725) 41.823,56.742 ; 41.823,56.742 ccw(c41.777,56.725) 41.823,56.745 ; 41.823,56.742 41.823,56.742 ; 41.823,56.742 41.823,56.742 ; 41.823,56.742 42.572,54.736 ; 42.573,54.733 ccw(c42.525,54.718) 42.572,54.736 ; 42.573,54.733 ccw(c42.525,54.718) 42.572,54.735 ; 42.573,54.733 43.225,52.693 ; 42.572,54.735 ccw(c42.525,54.718) 42.572,54.736 ; 42.572,54.736 42.572,54.736 ; 42.572,54.736 42.572,54.735 ; 43.225,52.691 ccw(c43.177,52.678) 43.225,52.693 ; 43.226,52.691 ccw(c43.177,52.678) 43.225,52.691 ; 43.226,52.691 ccw(c43.177,52.678) 43.225,52.693 ; 43.225,52.691 43.226,52.691 ; 43.226,52.691 43.226,52.691 ; 43.226,52.691 43.78,50.622 ; 43.78,50.62 ccw(c43.732,50.609) 43.78,50.622 ; 43.78,50.62 ccw(c43.732,50.609) 43.78,50.62 ; 43.78,50.62 ccw(c43.732,50.609) 43.78,50.622 ; 43.78,50.62 43.78,50.62 ; 43.78,50.62 43.78,50.62 ; 43.78,50.62 44.236,48.527 ; 43.78,50.622 ccw(c43.732,50.609) 43.78,50.622 ; 43.78,50.622 43.78,50.622 ; 43.78,50.622 43.78,50.622 ; 44.236,48.524 ccw(c44.187,48.516) 44.236,48.527 ; 44.236,48.525 ccw(c44.187,48.516) 44.236,48.527 ; 44.236,48.525 44.236,48.524 ; 44.236,48.524 44.591,46.413 ; 44.236,48.527 ccw(c44.187,48.516) 44.236,48.527 ; 44.236,48.527 44.236,48.527 ; 44.236,48.527 44.236,48.527 ; 44.592,46.41 ccw(c44.542,46.404) 44.591,46.412 ; 44.592,46.41 ccw(c44.542,46.404) 44.591,46.413 ; 44.592,46.41 44.846,44.283 ; 44.591,46.413 44.591,46.412 ; 44.846,44.281 ccw(c44.796,44.278) 44.846,44.283 ; 44.846,44.281 ccw(c44.796,44.278) 44.846,44.283 ; 44.846,44.281 44.999,42.145 ; 45,39.95 ccw(c45,40) 45.05,40 ; 45,39.95 ccw(c45,40) 45.05,40 ; 44.999,42.142 ccw(c44.949,42.141) 44.999,42.145 ; 44.999,42.142 ccw(c44.949,42.141) 44.999,42.145 ; 44.999,42.142 44.999,42.142 ; 44.999,42.142 45.05,40.002 ; 45.05,40 ccw(c45,40) 45.05,40.001 ; 45.05,40 ccw(c45,40) 45.05,40.002 ; 45.05,40.002 45.05,40.001

## Silkscreen, mask and mechanical layers (free items; w line width, h text height)
Mechanical 1:
  drawing of 350 lines, arcs and shapes, not listed